# Altium PCB MB1367.PcbDoc (part 5 of 6)
Units mm, origin at the board's own origin, x right, y up, seen from the top; angles counter-clockwise.
Board outline 70 x 82.5 mm, 4 copper layers (Top Layer, Signal Layer 1, Signal Layer 2, Bottom Layer), stack 1.614 mm thick; 192 components, 143 nets, 810 pads, 920 vias.
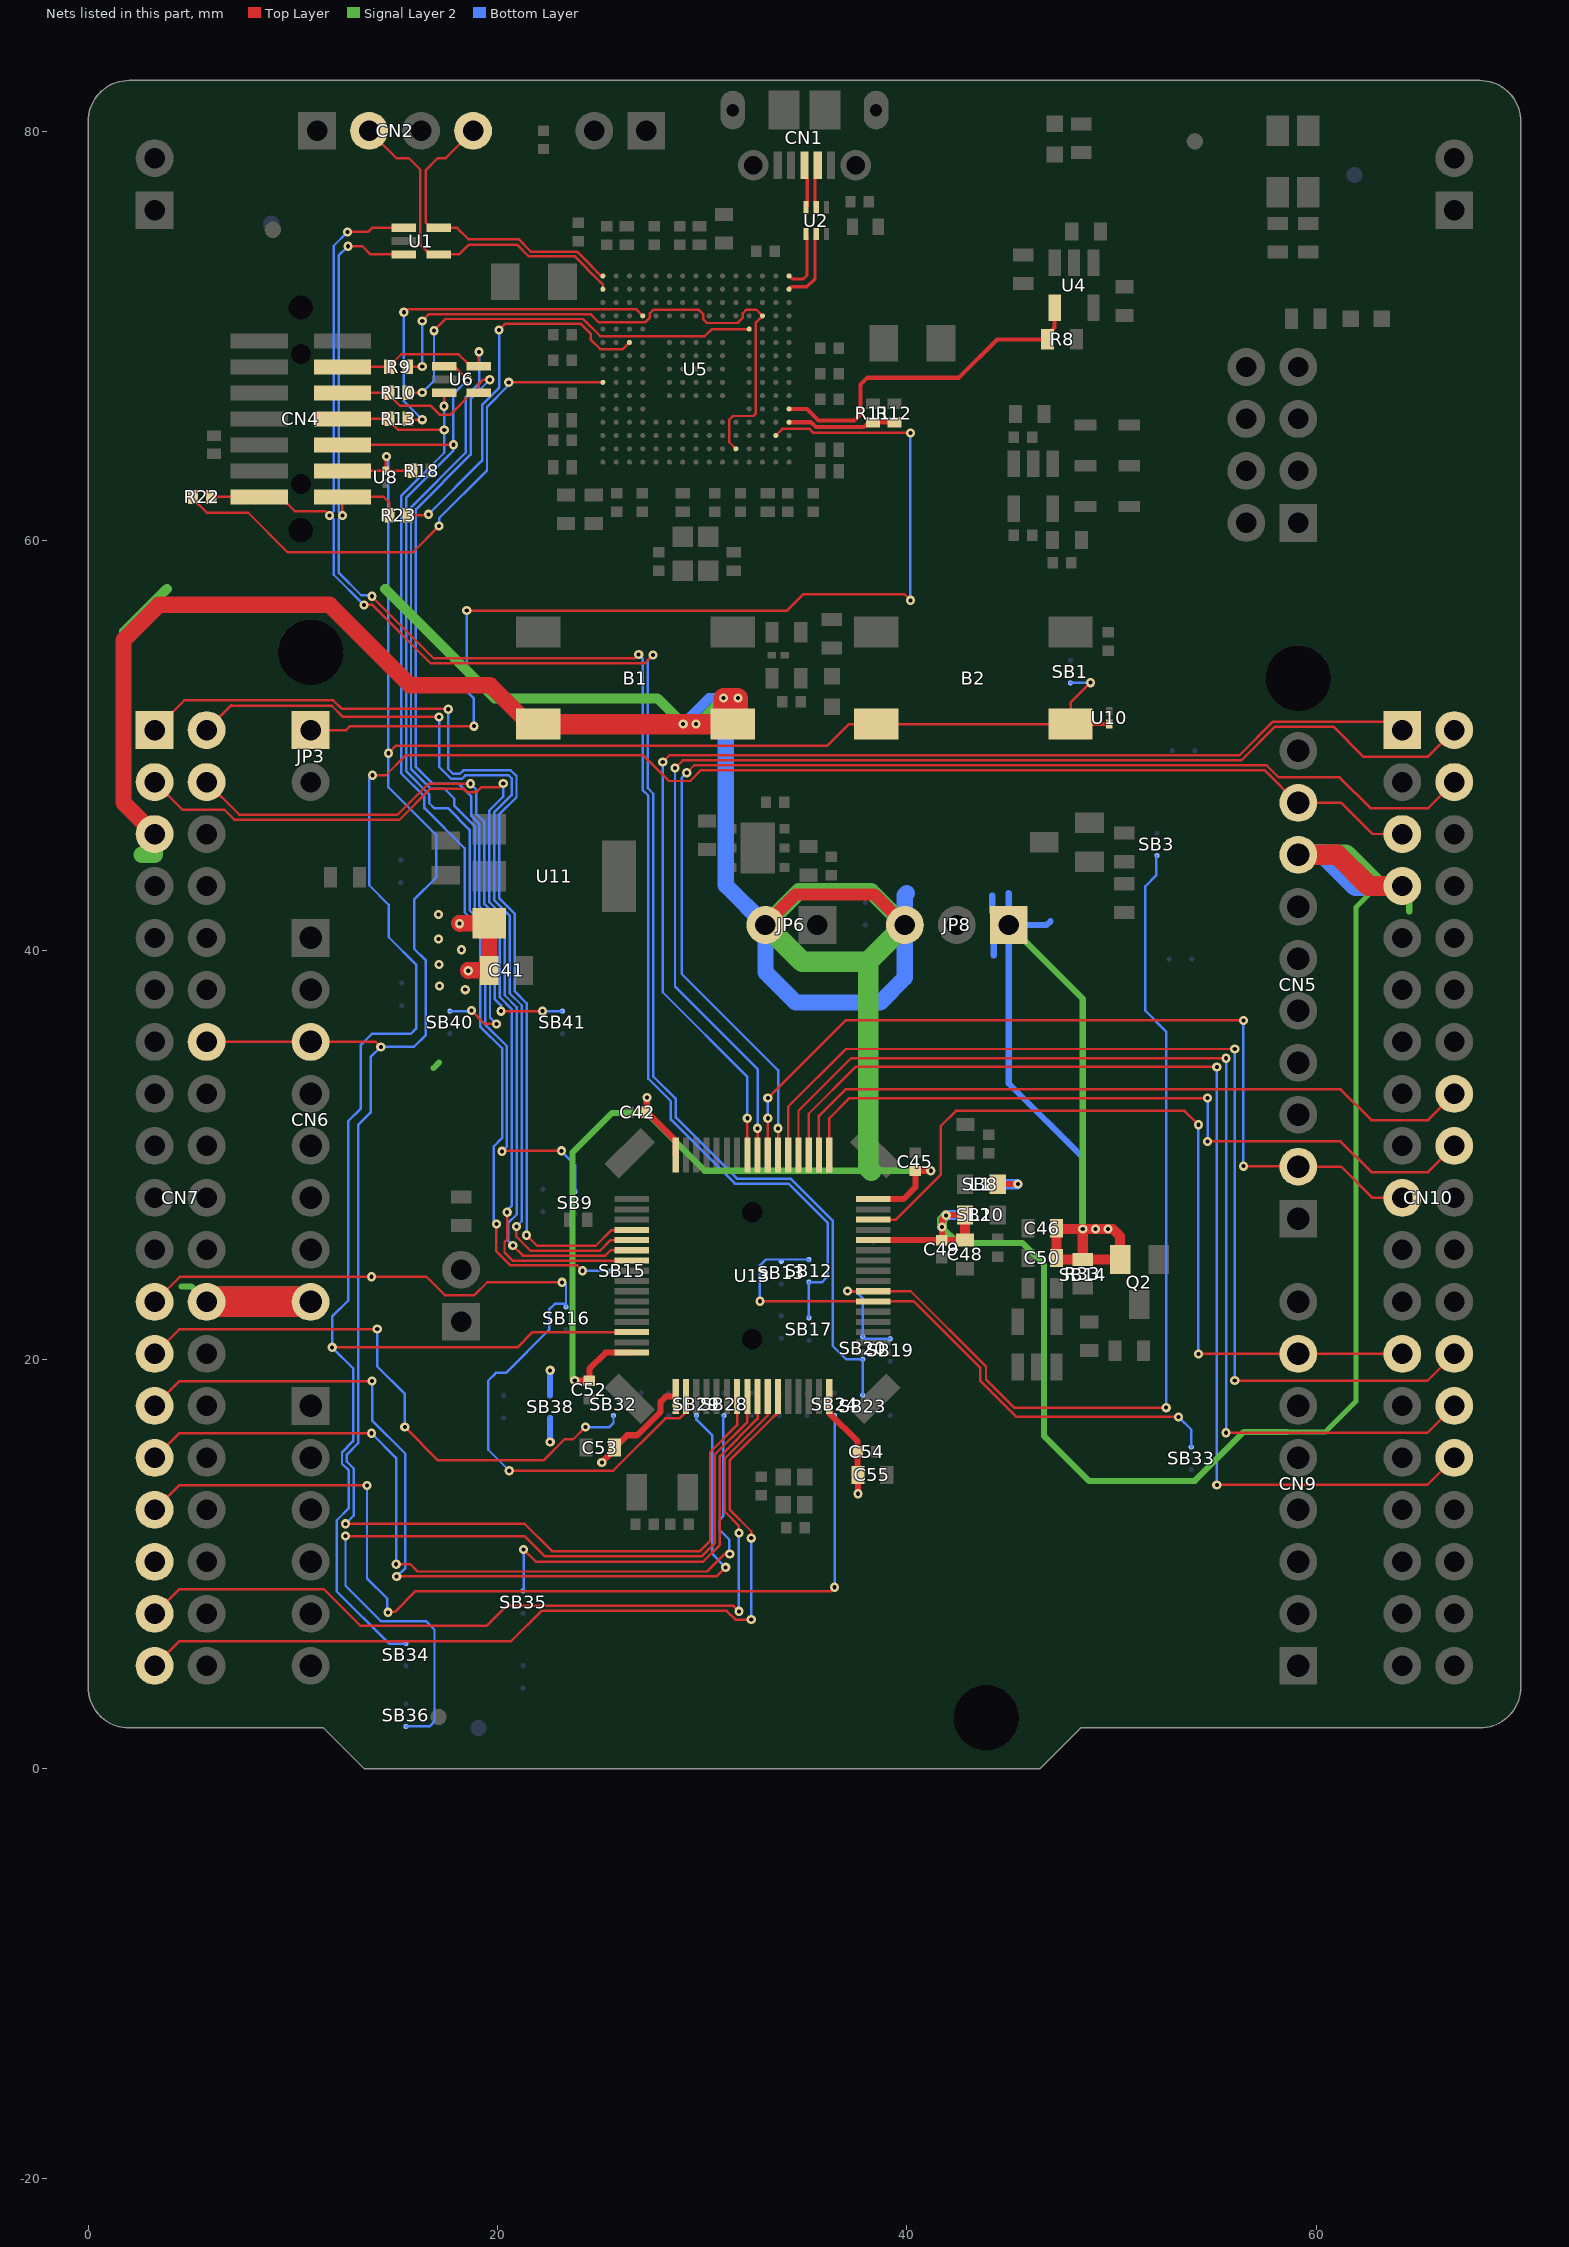
[diagram p6: the nets of this part, all layers, seen from the top]

## Via types
v1: diameter 0.45, hole 0.2, Top Layer to Bottom Layer, tented both sides, 920 vias

## Nets (pads, with @x,y where several pads share a name; then routed paths per layer and width w, separated by ;. In a path a pad name is that pad's centre, name@x,y a point inside that pad or via, vN(x,y) a via of type N, cw(c..) or ccw(c..) an arc to the next point about the centre after c; other vN are vias at no path point) (continued)
PB9: CN5.9 CN10.5 SB34.2 U13.62 | length 116.9
  Top Layer w0.12: v1(11.925,20.6) 20.975,20.6 21.715,21.34 U13.62@26.56,21.34 ; v1(13.895,48.55) 14.539,48.55 15.509,49.52 27.13,49.52 28.38,48.27 29.418,48.27 29.948,48.8 57.486,48.8 59.082,47.204 CN5.9@59.13,47.204 61.241,47.204 62.765,45.68 CN10.5@64.21,45.68
  Bottom Layer w0.12: v1(13.895,48.55) 13.736,48.391 13.736,43.175 14.69,42.221 14.69,40.637 16.025,39.302 16.025,36.17 15.775,35.92 13.866,35.92 13.325,35.379 13.325,32.268 12.71,31.653 12.71,22.885 11.925,22.1 v1(11.925,20.6) 12.95,19.575 12.95,16.014 12.405,15.469 12.405,14.908 12.74,14.573 12.74,12.74 12.15,12.15 12.15,8.675 14.7,6.125 SB34.2@15.525,6.125
PB10: CN9.7 CN10.25 U13.30 | length 40.9
  Top Layer w0.12: U13.30@38.36,26.84 39.465,26.84 41.65,29.025 41.65,31.4 42.4,32.15 53.575,32.15 v1(54.25,31.475) ; v1(54.25,20.275) 55.55,20.275 55.555,20.28 CN9.7@59.13,20.28 CN10.25@64.21,20.28
  Bottom Layer w0.12: v1(54.25,20.275) v1(54.25,31.475)
PB11: CN10.18 U13.33 | length 36
  Top Layer w0.12: U13.33@36.21,29.99 36.21,31.785 37.2,32.775 v1(54.7,32.775) ; v1(54.7,30.66) 61.2,30.66 62.7,29.16 65.47,29.16 CN10.18@66.75,30.44
  Bottom Layer w0.12: v1(54.7,30.66) v1(54.7,32.775)
PB12: CN10.16 U13.34 | length 34.6
  Top Layer w0.12: U13.34@35.71,29.99 35.71,31.91 37,33.2 61.2,33.2 62.7,31.7 65.47,31.7 CN10.16@66.75,32.98
PB13: CN10.30 U13.35 | length 55.5
  Top Layer w0.12: U13.35@35.21,29.99 35.21,32.01 37.5,34.3 v1(55.15,34.3) ; v1(55.15,13.875) 55.595,13.875 55.6,13.88 65.43,13.88 CN10.30@66.75,15.2
  Bottom Layer w0.12: v1(55.15,13.875) v1(55.15,34.3)
PB14: CN10.28 U13.36 | length 54.1
  Top Layer w0.12: U13.36@34.71,29.99 34.71,32.16 37.275,34.725 v1(55.6,34.725) ; v1(55.6,16.425) 55.605,16.42 65.43,16.42 CN10.28@66.75,17.74
  Bottom Layer w0.12: v1(55.6,16.425) v1(55.6,34.725)
PB15: CN10.26 U13.37 | length 52.8
  Top Layer w0.12: U13.37@34.21,29.99 34.21,32.36 37.025,35.175 v1(56.025,35.175) ; v1(56.025,18.975) 56.04,18.96 65.43,18.96 CN10.26@66.75,20.28
  Bottom Layer w0.12: v1(56.025,18.975) v1(56.025,35.175)
PC0: SB36.1 U13.8 | length 40.2
  Top Layer w0.12: v1(12.575,11.375) 21.325,11.375 22.315,10.385 29.967,10.385 30.625,11.043 30.625,15.372 32.21,16.957 U13.8@32.21,18.19
  Bottom Layer w0.12: v1(12.575,11.375) 12.575,8.95 14.3,7.225 16.5,7.225 16.925,6.8 16.925,2.325 16.675,2.075 SB36.1@15.525,2.075
PC1: SB35.1 U13.9 | length 20.2
  Top Layer w0.12: v1(21.275,10.725) 21.875,10.125 30.046,10.125 30.865,10.944 30.865,15.273 32.71,17.118 U13.9@32.71,18.19
  Bottom Layer w0.12: SB35.1@21.25,8.7 21.275,8.725 v1(21.275,10.725)
PC2: CN7.35 U13.10 | length 41.9
  Top Layer w0.12: CN7.35@3.25,7.58 4.455,8.785 11.515,8.785 13.295,7.005 19.48,7.005 20.44,7.965 31.535,7.965 v1(31.8,7.7) ; v1(31.8,11.525) 31.8,11.874 31.105,12.569 31.105,15.173 33.21,17.278 U13.10@33.21,18.19
  Bottom Layer w0.12: v1(31.8,7.7) v1(31.8,11.525)
PC3: CN7.37 U13.11 | length 42.8
  Top Layer w0.12: CN7.37@3.25,5.04 4.455,6.245 20.672,6.245 22.152,7.725 31.2,7.725 31.63,7.295 32.38,7.295 32.4,7.275 v1(32.4,7.3) ; v1(32.4,11.275) 32.4,11.613 31.345,12.668 31.345,15.074 33.431,17.16 33.435,17.16 33.54,17.265 33.54,17.269 33.586,17.315 33.615,17.315 33.71,17.41 U13.11@33.71,18.19
  Bottom Layer w0.12: v1(32.4,7.3) v1(32.4,11.275)
PC4: SB12.2 SB13.1 SB33.2 U13.22 | length 29.3
  Top Layer w0.12: v1(32.825,22.85) 32.835,22.84 40.353,22.84 43.595,19.598 43.595,18.962 45.357,17.2 v1(53.275,17.2)
  Bottom Layer w0.12: v1@32.825,22.825 v1(32.825,22.85) 32.825,24.6 33.115,24.89 SB12.2@35.22,24.89 SB12.2@35.22,24.805 ; v1(53.275,17.2) 53.9,16.575 SB33.2@53.9,15.725
PC5: SB3.2 SB19.1 SB20.2 U13.23 | length 50.1
  Top Layer w0.12: v1@37.075,23.35 37.085,23.34 40.193,23.34 43.87,19.663 43.87,19.026 45.246,17.65 v1(52.675,17.65)
  Bottom Layer w0.12: v1(37.1,23.35) 37.5,23.35 37.845,23.005 SB20.2@37.845,21.115 37.945,21.015 SB19.1@39.195,21.015 ; SB3.2@52.225,44.625 52.2,44.6 52.2,43.675 51.65,43.125 51.65,37.05 52.675,36.025 v1(52.675,17.65)
PC6: CN10.4 U13.38 | length 59.8
  Top Layer w0.12: v1(29.25,48.675) 29.615,49.04 57.585,49.04 58.175,48.45 61.15,48.45 62.65,46.95 65.48,46.95 CN10.4@66.75,48.22 ; U13.38@33.71,29.99 v1(33.71,31.3)
  Bottom Layer w0.12: v1(29.25,48.675) 29,48.425 29,38.85 33.71,34.14 v1(33.71,31.3)
PC7: CN5.2 CN10.19 U13.39 | length 43.1
  Top Layer w0.12: U13.39@33.21,29.99 v1(33.21,31.79) ; v1(33.21,32.775) 37.01,36.575 v1(56.45,36.575) ; v1(56.45,29.45) 59.104,29.45 CN5.2@59.13,29.424 61.241,29.424 62.765,27.9 CN10.19@64.21,27.9
  Bottom Layer w0.12: v1(33.21,31.79) v1(33.21,32.775) ; v1(56.45,29.45) v1(56.45,36.575)
PC8: CN10.2 U13.40 | length 60.7
  Top Layer w0.12: v1(28.673,48.9) 29.053,49.28 56.344,49.28 57.993,50.929 60.846,50.929 62.325,49.45 65.44,49.45 CN10.2@66.75,50.76 ; U13.40@32.71,29.99 v1(32.71,31.3)
  Bottom Layer w0.12: v1(28.673,48.9) 28.675,48.902 28.675,38.225 32.71,34.19 v1(32.71,31.3)
PC9: CN10.1 U13.41 | length 58
  Top Layer w0.12: v1(28.075,49.2) 28.395,49.52 56.245,49.52 57.9,51.175 63.795,51.175 CN10.1@64.21,50.76 ; U13.41@32.21,29.99 v1(32.21,31.79)
  Bottom Layer w0.12: v1(28.075,49.2) 28.075,37.95 32.21,33.815 v1(32.21,31.79)
PC10: CN7.1 U13.52 | length 50.7
  Top Layer w0.12: CN7.1@3.25,50.76 4.705,52.215 11.972,52.215 12.382,51.805 17.566,51.805 v1(17.596,51.775) ; v1(21.425,26.075) 21.94,25.56 24.8,25.56 25.55,26.31 26.56,26.31 U13.52@26.56,26.34
  Bottom Layer w0.12: v1(17.596,51.775) 17.596,48.86 17.833,48.622 18.169,48.622 18.334,48.787 20.649,48.787 20.93,48.507 20.93,47.478 20.08,46.628 20.08,42.551 20.835,41.796 20.835,38.001 21.425,37.411 v1(21.425,26.075)
PC11: CN7.2 U13.53 | length 48
  Top Layer w0.12: CN7.2@5.79,50.76 7.005,51.975 7.035,51.945 11.903,51.945 12.448,51.4 v1(17.15,51.4) ; v1(20.925,26.5) 20.925,26.002 21.607,25.32 25.005,25.32 25.525,25.84 U13.53@26.56,25.84
  Bottom Layer w0.12: v1(17.15,51.4) 17.15,48.966 17.734,48.382 18.268,48.382 18.433,48.547 20.55,48.547 20.69,48.407 20.69,47.578 19.84,46.728 19.84,42.451 20.595,41.696 20.595,37.901 21.185,37.311 21.185,26.76 v1(20.925,26.5)
PC12: CN7.3 U13.54 | length 48.5
  Top Layer w0.12: CN7.3@3.25,48.22 4.605,46.865 6.66,46.865 7.145,46.38 15.208,46.38 16.723,47.895 18.344,47.895 18.509,47.73 18.98,47.73 19.205,47.955 20.098,47.955 v1(20.285,48.142) ; v1(20.75,25.575) 21.245,25.08 25.265,25.08 25.525,25.34 U13.54@26.56,25.34
  Bottom Layer w0.12: v1(20.285,48.142) 20.275,48.15 20.275,47.502 19.6,46.827 19.6,42.352 20.355,41.597 20.355,37.802 20.945,37.212 20.945,27.093 20.52,26.668 20.52,25.805 v1(20.75,25.575)
PC13: CN7.23 SB16.2 U13.2 | length 43.7
  Top Layer w0.12: CN7.23@3.25,22.82 4.48,24.05 v1(13.85,24.05) 16.525,24.05 17.425,23.15 18.875,23.15 19.501,23.776 v1(23.151,23.776) ; v1(20.575,14.57) 25.65,14.57 28.205,17.125 28.9,17.125 29.21,17.435 U13.2@29.21,18.19
  Bottom Layer w0.12: v1(20.575,14.57) 19.55,15.595 19.55,18.975 19.925,19.35 20.417,19.35 22.525,21.458 22.525,22.45 22.8,22.725 23.35,22.725 ; v1(23.151,23.776) 23.249,23.776 23.35,23.675 23.35,22.725 ; SB16.2@23.35,22.575 23.35,22.725
PC14: CN7.25 SB32.1 | length 28.7
  Top Layer w0.12: CN7.25@3.25,20.28 4.455,21.485 14.11,21.485 v1(14.125,21.5) ; v1(15.475,16.7) 17.1,15.075 22.248,15.075 23.278,16.105 23.705,16.105 v1(24.3,16.7)
  Bottom Layer w0.12: v1(14.125,21.5) 14.125,19.664 15.475,18.314 v1(15.475,16.7) ; v1(24.3,16.7) 25.475,16.7 25.67,16.895 SB32.1@25.67,17.265
PC15: CN7.27 SB29.1 | length 45.8
  Top Layer w0.12: CN7.27@3.25,17.74 4.455,18.945 13.87,18.945 v1(13.875,18.95) ; v1(15.075,9.4) 15.08,9.405 30.705,9.405 v1(31.15,9.85)
  Bottom Layer w0.12: v1(13.875,18.95) 13.875,17.025 15.5,15.4 15.5,9.825 v1(15.075,9.4) ; SB29.1@29.72,17.265 29.72,17.065 30.5,16.285 30.5,10.5 v1(31.15,9.85)
PD2: CN7.4 U13.55 | length 44.4
  Top Layer w0.12: CN7.4@5.79,48.22 7.39,46.62 15.108,46.62 16.624,48.135 v1(18.677,48.135) ; v1(20.476,27.201) 20.476,25.874 20.345,25.743 20.345,25.234 20.739,24.84 U13.55@26.56,24.84
  Bottom Layer w0.12: v1(18.677,48.135) 18.965,47.847 18.965,46.666 19.36,46.271 19.36,42.252 20.115,41.497 20.115,37.702 20.705,37.112 20.705,27.53 20.476,27.301 v1(20.476,27.201)
PF0: CN7.29 SB28.1 | length 41.9
  Top Layer w0.12: CN7.29@3.25,15.2 4.455,16.405 13.845,16.405 v1(13.85,16.4) ; v1(15.05,10) 15.742,10 16.097,9.645 30.245,9.645 31.101,10.501 v1(31.352,10.501)
  Bottom Layer w0.12: v1(13.85,16.4) 15.05,15.2 v1(15.05,10) ; SB28.1@31.07,17.265 31.035,17.23 31.035,12.35 30.865,12.18 30.865,11.662 31.325,11.202 31.325,10.527 v1(31.352,10.501)
PF1: CN7.31 SB24.1 | length 48.3
  Top Layer w0.12: CN7.31@3.25,12.66 4.455,13.865 4.47,13.85 v1(13.625,13.85) ; v1(14.651,7.65) 14.675,7.675 14.989,7.675 15.999,8.685 36.285,8.685 v1(36.475,8.875)
  Bottom Layer w0.12: v1(13.625,13.85) 13.625,9.313 14.625,8.312 14.625,7.65 v1(14.651,7.65) ; SB24.1@36.47,17.265 36.425,17.22 36.475,17.17 v1(36.475,8.875)
STLK_SWCLK: CN2.2 U1.4 U5.A14 | length 17.3
  Top Layer w0.12: CN2.2@13.73,80.04 15.07,78.7 15.675,78.7 16.225,78.15 16.225,74.475 16.7,74 U1.4@17.125,74 18.125,74 18.605,74.48 20.95,74.48 21.53,73.9 23.795,73.9 24.375,73.32 24.375,73.294 25.024,72.645 25.03,72.645 25.15,72.525 U5.A14@25.15,72.3
STLK_SWDIO: CN2.4 U1.5 U5.A15 | length 15.4
  Top Layer w0.12: CN2.4@18.81,80.04 17.47,78.7 17.075,78.7 16.5,78.125 16.5,75.55 16.75,75.3 U1.5@17.125,75.3 18.025,75.3 18.575,74.75 21.019,74.75 21.629,74.14 23.894,74.14 24.615,73.419 24.615,73.399 25.064,72.95 U5.A15@25.15,72.95
STLK_VCP_RX: R23.1 U5.C10 | length 18.8
  Top Layer w0.12: R23.1@15.625,61.25 16.575,61.25 v1(16.627,61.302) ; v1(20.08,70.305) 20.075,70.305 20.375,70.605 24.081,70.605 24.555,70.13 24.555,69.845 25.025,69.375 26.125,69.375 U5.C10@26.45,69.7
  Bottom Layer w0.12: v1(16.627,61.302) 19.25,63.925 19.25,66.65 20.08,67.48 v1(20.08,70.305)
STLK_VCP_TX: R22.1 U5.A7 | length 26.8
  Top Layer w0.12: R22.1@5.125,62.15 5.125,62.05 5.8,61.375 7.825,61.375 9.75,59.45 15.875,59.45 v1(17.15,60.725) ; v1(20.55,67.75) U5.A7@25.15,67.75
  Bottom Layer w0.12: v1(17.15,60.725) 17.15,61.111 19.49,63.451 19.49,66.551 20.55,67.611 v1(20.55,67.75)
T_JTDI: CN4.10 SB9.1 U6.1 | length 53.5
  Top Layer w0.12: CN4.10@12.427,64.695 17.845,64.695 v1(17.85,64.7) ; U6.1@17.395,68.54 17.885,68.54 v1(18.55,67.875) ; v1(20.225,30.175) 20.25,30.2 v1(23.125,30.2)
  Bottom Layer w0.12: v1(18.55,67.875) 17.85,67.175 v1(17.85,64.7) 17.85,64.42 15.535,62.105 15.535,48.751 16.67,47.616 16.67,47.182 16.907,46.945 17.578,46.945 18.64,45.883 18.64,41.954 19.395,41.199 19.395,36.38 20.465,35.31 20.465,30.415 v1(20.225,30.175) ; v1(23.125,30.2) 23.1,30.2 23.795,29.505 SB9.1@23.795,28.215
T_NRST: B2.1 B2.2 CN4.12 CN6.3 CN7.14 R18.2 SB1.2 U8.1 U10.1 U13.7 | length 134.8
  Top Layer w0.12: CN7.14@5.79,35.52 CN6.3@10.87,35.52 14.055,35.52 v1(14.3,35.275) ; CN4.12@12.427,63.425 14.543,63.425 U8.1@14.545,63.427 ; v1(12.575,11.975) 21.336,11.975 22.686,10.625 29.867,10.625 30.385,11.143 30.385,15.471 31.71,16.796 U13.7@31.71,18.19 ; v1(14.575,64.125) 14.545,64.095 U8.1@14.545,63.427 ; v1(14.675,49.625) 15.05,50 36.125,50 37.175,51.05 B2.2@38.505,51.05 B2.1@48.005,51.05 ; R18.2@15.85,63.425 14.547,63.425 U8.1@14.545,63.427 ; B2.1@48.008,51.052 B2.1@48.005,51.05 ; v1(48.975,53.075) 48.005,52.105 B2.1@48.005,51.05
  Top Layer w0.2: B2.1@48.008,51.052 U10.1@49.895,51.052
  Bottom Layer w0.12: v1(12.575,11.975) 12.98,12.38 12.98,14.672 12.645,15.007 12.645,15.37 13.19,15.915 13.19,31.454 13.805,32.069 13.805,34.78 v1(14.3,35.275) 15.913,35.275 16.505,35.867 16.505,39.501 15.93,40.076 15.93,42.475 17.01,43.555 17.01,45.631 14.675,47.966 v1(14.675,49.625) 14.675,64.025 v1(14.575,64.125) ; SB1.2@47.995,53.065 48.965,53.065 v1(48.975,53.075)
T_NRSTa: JP3.1 U5.P3 | length 51
  Top Layer w0.12: JP3.1@10.87,50.76 12.61,50.76 12.8,50.95 v1(18.85,50.95) ; v1(18.5,56.6) 34.15,56.6 34.95,57.4 39.875,57.4 v1(40.175,57.1) ; U5.P3@33.6,65.15 33.925,65.475 35.251,65.475 35.446,65.28 40.145,65.28 40.15,65.275 v1(40.175,65.275)
  Bottom Layer w0.12: v1(18.5,56.6) 18.5,52.65 18.85,52.3 v1(18.85,50.95) ; v1(40.175,57.1) v1(40.175,65.275)
T_PWR_EN: R8.1 U4.4 U5.R5 | length 17.1
  Top Layer w0.2: U5.R5@34.25,66.45 35.125,66.45 35.695,65.88 37.455,65.88 37.745,66.17 37.745,67.645 38.075,67.975 42.55,67.975 44.42,69.845 R8.1@46.885,69.845 46.885,70.085 47.225,70.425 U4.4@47.225,71.395
T_PWR_EXT: R11.2 R12.2 U5.R4 | length 5.3
  Top Layer w0.2: U5.R4@34.25,65.8 35.322,65.8 35.562,65.56 37.91,65.56 38.15,65.8 R11.2@38.35,65.8 R12.2@39.4,65.8
T_SWCLK: CN4.6 R10.2 SB41.1 U6.4 | length 46.5
  Top Layer w0.12: CN4.6@12.427,67.235 14.715,67.235 R10.2@14.72,67.24 14.72,67.13 15.25,66.6 16.75,66.6 17.175,66.175 17.7,66.175 18.765,67.24 U6.4@19.095,67.24 19.095,67.67 19.3,67.875 v1(19.625,67.875) ; v1(20.175,37.025) v1(22.2,37.025)
  Bottom Layer w0.12: v1(19.625,67.875) 18.69,66.94 18.69,64.215 16.015,61.54 16.015,48.95 16.823,48.142 18.097,48.142 18.725,47.514 18.725,46.567 19.12,46.172 19.12,42.153 19.875,41.398 19.875,37.603 20.175,37.303 v1(20.175,37.025) ; v1(22.2,37.025) SB41.1@23.175,37.025
T_SWCLKa: R10.1 U5.M11 | length 20.1
  Top Layer w0.12: R10.1@15.62,67.24 16.315,67.24 v1(16.325,67.25) ; v1(16.9,70.275) 17.47,70.845 24.18,70.845 25.02,70.005 30.13,70.005 30.475,70.35 U5.M11@32.3,70.35
  Bottom Layer w0.12: v1(16.325,67.25) 16.9,67.825 v1(16.9,70.275)
T_SWDIO: CN4.4 R9.2 SB40.1 U6.5 | length 47
  Top Layer w0.12: CN4.4@12.427,68.505 R9.2@14.71,68.505 ; R9.2@14.75,68.525 14.75,68.575 15.3,69.125 18.1,69.125 18.685,68.54 U6.5@19.095,68.54 19.095,69.345 19.1,69.34 v1(19.1,69.24) ; v1(18.725,37.05) 19.375,36.4 v1(19.95,36.4)
  Bottom Layer w0.12: SB40.1@17.675,37.025 18.7,37.025 v1(18.725,37.05) ; v1(19.1,69.24) 19.1,67.689 18.45,67.039 18.45,64.314 15.775,61.639 15.775,48.851 16.723,47.902 17.4,47.902 17.9,47.403 17.895,47.398 17.895,47.057 18.88,46.072 18.88,42.054 19.635,41.299 19.635,36.715 v1(19.95,36.4)
T_SWDIOa: R9.1 U5.L2 U5.N12 | length 29.1
  Top Layer w0.12: R9.1@15.62,68.515 16.315,68.515 v1(16.325,68.525) ; v1(16.325,70.75) 16.66,71.085 24.54,71.085 24.95,70.675 27.206,70.675 27.445,70.914 27.445,71.126 27.624,71.305 29.826,71.305 30.045,71.086 30.045,70.844 30.239,70.65 31.731,70.65 31.995,70.914 31.995,71.126 32.174,71.305 32.645,71.305 U5.N12@32.95,71 32.625,70.675 32.625,66.225 32.505,66.105 31.505,66.105 31.325,65.925 31.325,64.825 U5.L2@31.65,64.5
  Bottom Layer w0.12: v1(16.325,68.525) v1(16.325,70.75)
T_SWO: CN4.8 R13.2 SB15.2 U6.3 | length 56.7
  Top Layer w0.12: CN4.8@12.427,65.965 R13.2@14.72,65.965 14.72,65.855 15.14,65.435 17.39,65.435 v1(17.4,65.425) ; U6.3@17.015,67.24 U6.3@17.395,67.24 v1(17.395,66.58) ; v1(19.95,26.625) 19.95,25.289 20.639,24.6 23.9,24.6 v1(24.16,24.34)
  Bottom Layer w0.12: v1@17.395,66.575 v1(17.395,66.58) ; v1@17.4,66.575 v1(17.4,65.425) 17.4,64.309 15.295,62.204 15.295,48.652 16.43,47.517 16.43,46.947 18.4,44.977 18.4,41.855 19.155,41.1 19.155,36.281 20.225,35.211 20.225,30.825 19.82,30.42 19.82,26.755 v1(19.95,26.625) ; v1(24.16,24.34) SB15.2@25.545,24.34
T_SWOa: R13.1 U5.D12 | length 18.3
  Top Layer w0.12: v1(15.425,71.175) 15.575,71.325 26.775,71.325 U5.D12@27.1,71 ; R13.1@15.62,65.965 15.66,65.925 v1(16.325,65.925) v1@16.425,65.925
  Bottom Layer w0.12: v1(15.425,71.175) 15.42,71.17 15.42,66.83 v1(16.325,65.925)
T_VCP_RX: CN4.13 R22.2 SB20.1 SB23.1 U1.1 | length 86.4
  Top Layer w0.12: R22.2@6.025,62.15 8.358,62.15 8.37,62.138 8.375,62.143 9.407,62.143 10.1,61.45 11.6,61.45 v1(11.8,61.25) ; v1(12.675,75.1) 13.675,75.1 13.875,75.3 U1.1@15.425,75.3 ; v1(13.475,56.875) 13.886,56.875 16.736,54.025 27.2,54.025 v1(27.6,54.425)
  Bottom Layer w0.12: v1(12.675,75.1) 12,74.425 12,61.45 v1(11.8,61.25) 12,61.05 12,58.35 v1(13.475,56.875) ; v1(27.6,54.425) 27.35,54.175 27.35,47.914 27.615,47.649 27.615,33.824 28.715,32.724 28.715,31.824 31.699,28.84 34.324,28.84 36.375,26.789 36.375,20.675 37.035,20.015 SB20.1@37.845,20.015 SB23.1@37.845,18.265
T_VCP_TX: CN4.14 R23.2 SB12.1 SB17.1 U1.3 | length 78.3
  Top Layer w0.12: v1(12.425,61.25) v1(12.425,61.25) CN4.14@12.427,62.155 14.445,62.155 14.725,61.875 R23.2@14.725,61.25 ; v1(12.7,74.4) 13.4,74.4 13.8,74 U1.3@15.425,74 ; v1(13.875,57.3) 13.95,57.375 13.95,57.2 16.885,54.265 26.715,54.265 v1(26.9,54.45)
  Bottom Layer w0.12: v1(12.7,74.4) 12.24,73.94 12.24,61.435 v1(12.425,61.25) 12.24,61.065 12.24,58.449 13.345,57.345 13.83,57.345 v1(13.875,57.3) ; v1(26.9,54.45) 27.11,54.24 27.11,47.815 27.375,47.55 27.375,33.725 28.475,32.625 28.475,31.725 31.6,28.6 34.225,28.6 36.135,26.69 36.135,24.055 35.87,23.79 SB12.1@35.22,23.79 SB17.1@35.22,22.04
USB_DEV_HS_CN_N: CN1.2 U2.5 | length 2.1
  Top Layer w0.16: U2.5@35.575,76.3 35.518,76.357 35.518,77.693 35.65,77.825 CN1.2@35.65,78.35
USB_DEV_HS_CN_P: CN1.3 U2.6 | length 2.1
  Top Layer w0.16: CN1.3@35,78.35 35,77.825 35.132,77.693 35.132,76.357 U2.6@35.075,76.3
USB_DEV_HS_N: U2.2 U5.R14 | length 3.7
  Top Layer w0.16: U5.R14@34.25,72.3 34.364,72.414 35.114,72.414 35.518,72.818 35.518,74.943 U2.2@35.575,75
USB_DEV_HS_P: U2.1 U5.R15 | length 3.1
  Top Layer w0.16: U5.R15@34.25,72.95 34.4,72.8 34.954,72.8 35.125,72.971 35.125,74.95 U2.1@35.075,75
VBAT: C53.2 CN7.33 SB38.2 U13.1 | length 6.5
  Top Layer w0.3: v1(25.1,14.975) 25.725,15.6 C53.2@25.725,15.7 26.33,16.305 26.825,16.305 27.967,17.448 27.967,17.942 28.215,18.19 U13.1@28.71,18.19
  Bottom Layer w0.3: v1(22.575,15.975) SB38.2@22.575,17.15
VDD: B1.1 B1.2 C42.2 C45.2 C52.2 C54.2 C55.2 CN7.5 JP6.2 JP8.3 L1.1 SB8.1 SB38.1 U13.16 U13.32 U13.48 U13.64 | length 201.2
  Top Layer w0.3: v1(23.775,18.975) 23.785,18.965 C52.2@24.495,18.965 24.495,19.545 25.29,20.34 U13.64@26.56,20.34 ; v1(27.3,32.8) 27.295,32.795 C42.2@27.295,32.09 27.31,32.09 28.71,30.69 U13.48@28.71,29.99 ; U13.16@36.21,18.19 36.21,17.39 37.595,16.005 C54.2@37.595,15.49 37.595,14.39 C55.2@37.62,14.365 v1(37.62,13.445) ; U13.32@38.36,27.84 39.84,27.84 40.42,28.42 C45.2@40.42,29.215 41.185,29.215 v1(41.175,29.225) ; L1.1@44.445,28.565 44.455,28.575 v1(45.425,28.575)
  Top Layer w0.6: JP6.2@33.095,41.235 33.095,41.252 34.568,42.725 38.415,42.725 JP8.3@39.905,41.235
  Top Layer w0.8: CN7.5@3.25,45.68 1.725,47.205 1.725,55.15 3.45,56.875 11.8,56.875 15.725,52.95 19.65,52.95 B1.2@21.55,51.05
  Top Layer w1: B1.2@21.55,51.05 B1.2@21.995,51.05 v1(29.7,51.05) B1.1@31.495,51.05 ; B1.1@31.495,51.05 31.05,51.495 v1(31.05,52.325) v1(31.75,52.325) 31.75,51.305 B1.1@31.495,51.05
  Signal Layer 2 w0.3: v1(23.775,18.975) 23.665,19.085 23.665,30.115 25.6,32.05 27.3,32.05 ; v1(27.3,32.8) 27.3,32.05 ; v1(41.175,29.225) 38.275,29.225 30.125,29.225 27.3,32.05
  Signal Layer 2 w0.5: CN7.5@3.25,45.68 1.77,47.16 1.77,55.57 3.85,57.65 ; 14.515,57.65 19.865,52.3 27.825,52.3 v1(29.075,51.05) 29.775,51.05 v1(31.05,52.325) v1(31.75,52.325)
  Signal Layer 2 w0.8: 2.618,44.665 3.25,44.665 CN7.5@3.25,45.68 ; JP6.2@33.095,41.235 34.735,42.875 38.265,42.875 JP8.3@39.905,41.235
  Signal Layer 2 w1: JP6.2@33.095,41.235 34.88,39.45 38.12,39.45 ; 38.275,29.225 38.12,29.38 38.12,39.45 ; JP8.3@39.905,41.235 38.12,39.45
  Bottom Layer w0.3: SB38.1@22.575,18.25 v1(22.575,19.475) ; v1(37.62,13.445) v1@37.625,13.45 ; v1@45.415,28.565 v1(45.425,28.575)
  Bottom Layer w0.5: v1(29.075,51.05) v1@29.125,51.1 ; v1@29.1,51.1 v1@29.125,51.1 ; SB8.1@44.145,28.565 v1@45.415,28.565 ; v1@29.125,51.1 30.35,52.325 v1(31.05,52.325) v1(31.75,52.325) 31.75,51.775 31.15,51.175 31.075,51.1 v1@29.125,51.1
  Bottom Layer w0.8: v1(31.05,52.325) 31.15,52.225 31.15,51.175 31.15,43.18 JP6.2@33.095,41.235 33.095,38.93 34.575,37.45 38.7,37.45 39.905,38.655 JP8.3@39.905,41.235 39.905,42.69 40,42.785
VIN: C41.2 CN6.8 CN7.24 U11.3 | length 16.9
  Top Layer w0.8: v1(18.15,41.3) 18.135,41.315 U11.3@19.595,41.315 C41.2@19.595,39.015 18.56,39.015 v1(18.575,39)
  Top Layer w1.5: CN7.24@5.79,22.82 CN6.8@10.87,22.82
  Signal Layer 2 w0.3: 4.575,23.575 5.035,23.575 CN7.24@5.79,22.82 ; 16.88,34.248 17.15,34.518
  Signal Layer 2 w1.5: CN7.24@5.79,22.82 CN6.8@10.87,22.82
  other v1: 18.425,38.075 17.175,38.25 17.15,39.3 18.25,40.025 17.125,40.55 17.125,41.75
VREF: C46.2 C50.2 JP8.1 Q2.2 R33.2 SB14.1 | length 54.7
  Top Layer w0.5: R33.2@48.595,24.89 48.595,26.37 v1(48.6,26.375) ; R33.2@48.595,24.89 Q2.2@50.42,24.89 50.42,26.03 50.075,26.375 v1(49.825,26.375) v1(49.225,26.375) v1(48.6,26.375) ; R33.2@48.595,24.89 47.395,24.89 C50.2@47.32,24.965 C46.2@47.32,26.415 47.36,26.375 v1(48.6,26.375)
  Signal Layer 2 w0.3: JP8.1@44.985,41.235 48.6,37.62 v1(48.6,26.375) v1(49.225,26.375) v1(49.825,26.375)
  Bottom Layer w0.3: 44.175,42.675 44.175,41.875 44.815,41.235 JP8.1@44.985,41.235 ; 44.25,39.75 44.25,40.5 JP8.1@44.985,41.235 ; 44.975,42.785 44.985,42.775 JP8.1@44.985,41.235 ; 47.025,41.425 46.835,41.235 JP8.1@44.985,41.235 ; SB14.1@48.595,24.69 48.6,24.695 v1(48.6,26.375) ; v1(49.825,26.375) v1(49.225,26.375) v1(48.6,26.375) ; JP8.1@44.985,41.235 44.985,33.49 48.6,29.875 v1(48.6,26.375)
VREFP: C48.1 C49.1 CN5.8 CN10.7 L2.2 SB10.2 U13.28 | length 86.2
  Top Layer w0.3: U13.28@38.36,25.84 C49.1@41.72,25.84 ; C48.1@42.845,25.84 C49.1@41.72,25.84 ; L2.2@42.845,27.065 41.94,27.065 v1(41.925,27.05) 41.72,26.845 v1(41.72,26.475) C49.1@41.72,25.84
  Top Layer w0.5: C48.1@42.845,25.84 L2.2@42.845,27.065
  Top Layer w1: CN5.8@59.13,44.664 61.036,44.664 62.56,43.14 CN10.7@64.21,43.14
  Signal Layer 2 w0.25: 58.597,16.47 60.455,16.47 61.95,17.965 61.95,42.105 62.985,43.14
  Signal Layer 2 w0.3: v1(41.72,26.475) 42.495,25.7 45.65,25.7 46.7,24.65 46.7,16.275 48.9,14.075 54.075,14.075 56.47,16.47 58.597,16.47 ; CN10.7@64.21,43.14 64.55,42.8 64.55,41.9
  Signal Layer 2 w0.5: v1(41.72,26.475) 41.72,26.845 v1(41.925,27.05)
  Signal Layer 2 w1: CN5.8@59.13,44.664 61.461,44.664 62.985,43.14 CN10.7@64.21,43.14
  Bottom Layer w0.3: v1(41.925,27.05) v1@41.94,27.065
  Bottom Layer w0.5: v1(41.72,26.475) 41.72,26.845 v1(41.925,27.05) ; v1@41.94,27.065 42.845,27.065
  Bottom Layer w1: CN5.8@59.13,44.664 60.411,44.664 61.935,43.14 CN10.7@64.21,43.14
pads on no net: CART-1.1 CN1.4 CN4.0 CN4.1 CN4.2 CN4.9 CN7.9 CN7.10 CN7.11 CN7.26 CN10.10 CN10.36 CN10.38 MP1.1 MP2.1 MP3.1 MP4.1 MP5.1 MP6.1 U2.4 U5.A1 U5.A2 U5.A3 U5.A4 U5.A5 U5.A6 U5.A8 U5.A9 U5.A10 U5.A11 U5.A12 U5.A13 U5.B1 U5.B2 U5.B3 U5.B4 U5.B5 U5.B6 U5.B7 U5.B8 U5.B9 U5.B10 U5.B11 U5.B12 U5.B13 U5.B14 U5.B15 U5.C2 U5.C3 U5.C4 U5.C11 U5.C12 U5.C13 U5.C14 U5.C15 U5.D1 U5.D2 U5.D3 U5.D4 U5.D10 U5.D11 U5.D13 U5.D14 U5.E1 U5.E2 U5.E3 U5.E4 U5.E12 U5.E13 U5.E14 U5.E15 U5.F1 U5.F4 U5.F14 U5.G4 U5.G14 U5.G15 U5.H1 U5.H2 U5.H3 U5.H4 U5.H14 U5.H15 U5.J2 U5.J3 U5.J4 U5.K1 U5.K2 U5.K3 U5.K12 U5.K14 U5.K15 U5.L1 U5.L3 U5.L12 U5.L13 U5.L14 U5.L15 U5.M2 U5.M3 U5.M4 U5.M5 U5.M6 U5.M7 U5.M12 U5.M13 U5.M14 U5.M15 U5.N2 U5.N4 U5.N5 U5.N6 U5.N7 U5.N11 U5.N13 U5.N14 U5.N15 U5.P2 U5.P4 U5.P5 U5.P6 U5.P7 U5.P8 U5.P9 U5.P10 U5.P11 U5.P12 U5.P13 U5.P14 U5.P15 U5.R2 U5.R3 U5.R6 U5.R7 U5.R8 U5.R9 U5.R10 U5.R11 U5.R12 U5.R13 U12.3 U12.5 U13.0 U14.1 U14.2

## Polygon pours and split planes (outlines as drawn)
GND on Top Layer "GND_L01_P002" (solid, remove dead copper, pour order 2): 31.675,77.625 33.25,76.05 33.25,71.275 34.15,70.375 38.15,70.375 40,72.225 40,82.5 30.65,82.5 30.65,78.675 31.675,77.65
5V_USB_STLK on Top Layer "5V_USB_STLK_L01_P078" (solid, remove dead copper, pour order 78): 49.5,77.075 49.1,76.675 49.1,74.95 48.825,74.675 48.825,72.9 48.85,72.925 51.775,72.925 52.45,72.25 61.65,72.25 61.85,72.45 61.85,73.325 61.575,73.6 54.575,73.6 51.1,77.075
AGND on Top Layer "AGND_L01_P066" (solid, remove dead copper, pour order 66): 46.5,23.025 46.25,23.275 46.25,24.875 46.25,26.875 46.025,27.1 45.275,27.1 45.125,26.95 45.125,25.575 44.9,25.35 44.095,25.35 43.97,25.225 41.05,25.225 40.925,25.35 40.82,25.35 40.75,25.28 40.75,23.375 43.625,20.5 46,20.5 46.5,21
5V_VIN on Top Layer "5V_VIN_L01_P036" (solid, remove dead copper, pour order 36): 49.775,62.525 49.525,62.275 49.525,59.575 50.05,59.05 60.525,59.05 60.875,59.4 60.875,64.175 60.575,64.475 58.475,64.475 56.525,62.525
E5V on Top Layer "E5V_L01_P034" (solid, remove dead copper, pour order 34): 49.775,64.525 49.5,64.25 49.5,63.05 49.75,62.8 56.375,62.8 58.325,64.75 60.55,64.75 60.875,65.075 60.875,66.775 60.725,66.925 58.7,66.925 56.825,65.05 54.425,65.05 53.9,64.525
5V_USB_CHGR on Top Layer "5V_USB_CHGR_L01_P032" (solid, remove dead copper, pour order 32): 54.392,65.417 56.592,65.417 58.3,67.125 60.65,67.125 60.9,67.375 60.9,69.25 60.725,69.425 58.775,69.425 56.725,67.375 54.575,67.375 54.225,67.025 49.875,67.025 49.5,66.65 49.5,65 49.7,64.8 53.775,64.8
GND on Top Layer "GND_L01_P010" (solid, remove dead copper, pour order 10): 20.975,39.9 20.8,39.725 20.8,38.025 21.075,37.75 26.95,37.75 27.275,38.075 27.275,39.5 26.875,39.9
VIN on Top Layer "VIN_L01_P008" (solid, remove dead copper, pour order 8): 20.5,42.125 20.625,42 20.625,38.025 20.35,37.75 17.1,37.75 16.75,38.1 16.75,41.85 17.025,42.125
5V_VIN on Top Layer "5V_VIN_L01_P004" (solid, remove dead copper, pour order 4): 15.775,42.375 15.525,42.125 14.075,42.125 14,42.2 14,43.735 14.765,44.5 16.3,44.5 20.4,44.5 21,45.1 21,46.925 21.425,47.35 26.8,47.35 27.3,46.85 27.3,40.7 26.725,40.125 21.7,40.125 21.225,40.6 21.225,41.825 20.675,42.375
GND on Top Layer "GND_L01_P006" (solid, remove dead copper, pour order 6): 20.625,45.025 20.35,44.75 16.15,44.75 15.875,45.025 15.875,48.2 16.275,48.6 20.275,48.6 20.625,48.25
5V on Top Layer "5V_L01_P028" (solid, remove dead copper, pour order 28): 59.775,69.638 58.463,69.638 56.575,67.75 54.25,67.75 53.875,67.375 45.3,67.375 44.175,66.25 39.175,66.25 39.025,66.4 39.025,67.625 39.175,67.775 42.8,67.775 44.025,69 50.175,69 53.075,71.9 59.525,71.9 59.775,71.65
AGND on Top Layer "AGND_L01_P064" (solid, remove dead copper, pour order 64): 44.35,11.75 44,11.4 44,8.8 44.425,8.375 68.475,8.375 68.925,8.825 68.925,13.925 68.625,14.225 65.65,14.225 63.175,11.75
GND on Top Layer "GND_L01_P082" (solid, remove dead copper, pour order 82): 33.425,75.125 22.475,75.125 21.875,74.525 21.875,71.775 23,70.65 23,61.95 23.2,61.75 36,61.75 36.375,62.125 36.375,71.9 36.675,72.2 37.85,72.2 38.7,71.35 38.7,66.525 39.35,65.875 44.5,65.875 45.475,66.85 48.725,66.85 49.125,66.45 49.125,59.4 49.9,58.625 60.85,58.625 61.225,59 61.225,64.425 61.375,64.575 61.375,71.425 62.25,72.3 62.25,73.5 61.775,73.975 54.75,73.975 51.225,77.5 49.775,77.5 49.775,82.3 49.75,82.325 49.825,82.4 68.625,82.4 69.85,81.175 69.85,14.5 63.8,14.5 61.5,12.2 48.2,12.2 47,13.4 47,26.775 46.45,27.325 29.075,27.325 27.85,28.55 27.85,47.025 27.05,47.825 19.125,47.825 16.15,44.85 16.15,44.75 14.35,44.75 13.575,43.975 13.575,2.375 13.55,2.35 1.5,2.35 0.2,3.65 0.2,81.1 1.3,82.2 32.325,82.2 33.4,81.125
GND on Top Layer "GND_L01_P084" (solid, remove dead copper, pour order 84): 13.3,39.675 13.35,39.675 14.025,39 16.075,39 16.4,38.675 16.4,37.8 16.875,37.325 20.625,37.325 20.825,37.525 20.824,37.526 20.824,38.001 24.976,38.001 26.875,39.9 28.4,39.9 28.4,28.825 29.425,27.8 39.5,27.8 39.5,23.525 44.175,18.85 49.625,18.85 49.625,13.625 48.2,12.2 44.1,12.2 43.55,11.65 43.55,8.625 44.2,7.975 69.65,7.975 69.7,7.925 69.7,3.4 68.525,2.225 48.3,2.225 46.275,0.2 13.675,0.2 9.95,3.925 9.95,39.65
GND on Top Layer "GND_L01_P086" (solid, remove dead copper, pour order 86): 39.725,82.2 39.725,73.05 38.95,72.275 37.1,72.275 37.1,69.35 38.174,68.276 42.476,68.276 43.675,69.475 49.95,69.475 50.65,70.175 50.65,71.925 50,72.575 48.725,72.575 48.5,72.8 48.5,76.5 49.5,77.5 49.9,77.5 49.9,82.2
VIN on Bottom Layer "VIN_L04_P012" (solid, remove dead copper, pour order 12): 16.975,42.25 16.625,41.9 16.625,37.875 16.875,37.625 19.5,37.625 19.875,38 19.875,41.925 19.55,42.25
5V_VIN on Bottom Layer "5V_VIN_L04_P014" (solid, remove dead copper, pour order 14): 21.5,47.5 20.375,46.375 20.375,40.47 20.72,40.125 26.575,40.125 26.92,40.47 26.92,47.23 26.65,47.5
5V_USB_STLK on Bottom Layer "5V_USB_STLK_L04_P080" (solid, remove dead copper, pour order 80): 58.5,61.4 58.5,59.025 59,58.525 63.225,58.525 63.95,59.25 63.95,73.65 60.2,77.4 49.35,77.4 48.9,76.95 48.9,75.35 49.3,74.95 56.6,74.95 61.125,70.425 61.125,62.05 60.475,61.4
VREF on Bottom Layer "VREF_L04_P074" (solid, remove dead copper, pour order 74): 44.375,43.45 44,43.075 44,33.5 47.875,29.625 47.875,25.21 48.21,24.875 50.2,24.875 50.75,25.425 50.75,42.5 49.8,43.45
AGND on Bottom Layer "AGND_L04_P070" (solid, remove dead copper, pour order 70): 36.875,25.95 36.625,25.7 36.625,24.575 37,24.2 40.825,24.2 41.125,23.9 41.125,22.068 42.25,20.943 42.25,9.625 42.875,9 46.15,9 46.55,9.4 46.55,25.425 47.625,26.5 47.625,29.525 45.125,32.025 43.925,32.025 43.7,31.8 43.7,30.9 44.225,30.375 45.05,30.375 46.3,29.125 46.3,27.35 44.9,25.95
VDD on Bottom Layer "VDD_L04_P056" (solid, remove dead copper, pour order 56): 29.225,53 28.45,52.225 28.45,50.3 29.723,49.027 29.723,48.123 29.4,47.8 29.4,39.425 33.1,35.725 39.8,35.725 41.45,37.375 41.45,43 41,43.45 39.275,43.45 38.975,43.15 38.975,38.775 38.525,38.325 34.85,38.325 34.1,39.075 34.1,52.45 33.55,53
3V3 on Bottom Layer "3V3_L04_P048" (solid, remove dead copper, pour order 48): 34.5,39.325 35.025,38.8 38.3,38.8 38.625,39.125 38.625,63.45 38.3,63.775 36.875,63.775 36.5,63.4 36.5,58.4 34.5,56.4
E5V on Bottom Layer "E5V_L04_P042" (solid, remove dead copper, pour order 42): 49.775,64.525 49.5,64.25 49.5,63.05 49.75,62.8 56.375,62.8 58.325,64.75 60.55,64.75 60.875,65.075 60.875,66.775 60.725,66.925 58.7,66.925 56.825,65.05 54.425,65.05 53.9,64.525
5V_USB_CHGR on Bottom Layer "5V_USB_CHGR_L04_P040" (solid, remove dead copper, pour order 40): 54.392,65.417 56.592,65.417 58.3,67.125 60.65,67.125 60.9,67.375 60.9,69.9 60.475,70.325 50.35,70.325 49.5,69.475 49.5,65 49.7,64.8 53.775,64.8
5V_VIN on Bottom Layer "5V_VIN_L04_P038" (solid, remove dead copper, pour order 38): 57.675,59.175 57.725,59.175 58.175,59.625 58.175,61.75 58.325,61.9 60.5,61.9 60.875,62.275 60.875,64.175 60.575,64.475 58.475,64.475 56.525,62.525 49.775,62.525 49.525,62.275 49.525,59.75 50.1,59.175
3V3 on Bottom Layer "3V3_L04_P050" (solid, remove dead copper, pour order 50): 11.3,32 11.3,32.025 11.875,32.6 11.875,58 9.675,60.2 9.675,68.65 9.025,69.3 5.275,69.3 4.875,68.9 4.875,66.2 6,65.075 6,62.25 1.225,57.475 1.225,32.625 1.85,32
GND on Bottom Layer "GND_L04_P104" (solid, remove dead copper, pour order 104): 1.15,57.85 5.65,62.35 5.65,65.025 4.525,66.15 4.525,69.275 4.95,69.7 9.375,69.7 10.2,68.875 10.2,60.65 12.4,58.45 12.4,32.6 11.125,31.325 0.825,31.325 0.275,30.775 0.275,3.525 1.525,2.275 11.375,2.275 13.425,0.225 46.475,0.225 48.525,2.275 68.525,2.275 69.8,3.55 69.8,81.05 68.625,82.225 12.054,82.225 11.55,81.721 11.55,75.65 13.8,73.4 13.8,62.25 19.45,56.6 33.85,56.6 35.8,58.55 35.8,63.65 36.4,64.25 38.65,64.25 39.35,63.55 39.35,44.675 39.925,44.1 47.9,44.1 48.925,45.125 48.925,69.85 49.875,70.8 57.475,70.8 57.75,71.075 57.725,71.1 57.725,72.55 55.95,74.325 49.075,74.325 48.5,74.9 48.5,77.5 48.875,77.875 60.425,77.875 64.5,73.8 64.5,58.6 63.751,57.851 52.876,57.851 51.775,56.75 51.775,24.85 50.975,24.05 50.875,24.15 48.525,24.15 47.675,23.3 47.675,9.175 46.55,8.05 42.45,8.05 41.325,9.175 41.325,20.325 40.425,21.225 40.425,22.975 39.775,23.625 36.85,23.625 36.05,24.425 36.05,26.025 36.075,26.025 37,26.95 40.825,26.95 41.575,27.7 41.575,34.45 40.725,35.3 32.775,35.3 28.2,39.875 20.85,39.875 20.25,39.275 20.25,37.75 19.725,37.225 16.425,37.225 15.85,37.8 15.85,41.95 16.675,42.775 19.225,42.775 19.95,43.5 19.95,46.35 21.5,47.9 27.125,47.9 27.925,48.7 27.925,57.375 27.45,57.85 18.775,57.85 13.8,62.825 13.8,74.25 12.225,75.825 12.225,82.125 12,82.35 1.5,82.35 0.325,81.175 0.325,57.975 0.45,57.85
GND on Bottom Layer "GND_L04_P106" (solid, remove dead copper, pour order 106): 18.325,58.725 18.325,55.4 21.725,52 27.5,52 28.925,53.425 33.425,53.425 33.9,53.9 33.9,57.975 33.15,58.725
GND on Bottom Layer "GND_L04_P108" (solid, remove dead copper, pour order 108): 10.725,82.3 10.725,63.3 14.4,59.625 21.8,59.625 24.925,62.75 24.925,81.925 24.55,82.3
GND on Bottom Layer "GND_L04_P110" (solid, remove dead copper, pour order 110): 52.835,57.81 52.82,57.825 50.075,57.825 48.475,59.425 46.65,59.425 46.65,45.35 47.9,44.1 50.175,44.1 51.425,42.85 54.025,42.85 54.025,56.701 52.876,57.851
GND on Signal Layer 2 "GND_L03_P022" (solid, remove dead copper, pour order 22): 30.925,82.475 30.925,77.425 33.25,75.1 33.25,73.35 33.6,73 34.1,73 35.475,71.625 35.725,71.625 36.9,72.8 36.9,77.425 37.801,78.326 37.801,82.474 37.8,82.475
3V3_STLK on Signal Layer 2 "3V3_STLK_L03_P020" (solid, remove dead copper, pour order 20): 10.4,81.4 9.725,81.4 8.625,80.3 8.625,75.15 26.35,57.425 35.375,57.425 36.35,58.4 36.35,65.925 36.65,66.225 36.65,69.475 38.4,71.225 38.4,73.925 43.45,78.975 57.35,78.975 57.7,79.325 57.7,80.75 57.2,81.25 39.95,81.25 37.125,78.425 37.125,72.65 36.025,71.55 35.2,71.55 34.025,72.725 33.425,72.725 33.025,73.125 33.025,74.925 30.675,77.275 30.675,80.75 30.05,81.375
VDD on Signal Layer 2 "VDD_L03_P060" (solid, remove dead copper, pour order 60): 21.173,19.298 21.175,18.4 22,17.575 25.77,17.575 26.775,16.57 26.775,8 28,6.775 28.725,6.775 33.35,6.775 38.15,11.575 38.15,24.865 41.285,28 45.225,28 45.7,28.475 45.7,34.95 42.375,38.275 42.375,42.925 41.9,43.425 33.675,43.425 31.35,41.1 31.35,39.25 22.025,29.925 22.025,20.15
GND on Signal Layer 2 "GND_L03_P098" (solid, remove dead copper, pour order 98): 22.825,39.85 22.075,39.1 22.075,32.075 22.325,31.825 23.5,31.825 30.45,38.775 30.45,39.5 30.1,39.85
GND on Signal Layer 2 "GND_L03_P100" (solid, remove dead copper, pour order 100): 52.5,48.65 52.175,48.65 49.725,46.2 49.725,43.675 50.55,42.85 50.55,38.077 50.802,37.825 52.025,37.825 52.65,38.45 52.65,48.5
VREF on Signal Layer 2 "VREF_L03_P072" (solid, remove dead copper, pour order 72): 43.475,43.375 42.975,42.875 42.975,38.425 46.15,35.25 46.15,28 48.075,26.075 49.95,26.075 50.125,26.25 50.125,42.575 49.325,43.375
GND on Signal Layer 2 "GND_L03_P092" (solid, remove dead copper, pour order 92): 33.175,54.675 32.825,54.325 32.85,54.3 32.85,51.525 33,51.375 33.725,51.375 35.875,53.525 35.875,54.475 35.675,54.675
AGND on Signal Layer 2 "AGND_L03_P068" (solid, remove dead copper, pour order 68): 44,25.25 41.825,23.075 41.825,10.025 43.1,8.75 44.975,8.75 45.775,9.55 45.775,24.75 45.275,25.25
E5V on Signal Layer 2 "E5V_L03_P044" (solid, remove dead copper, pour order 44): 49.6,64.6 49.375,64.375 49.375,62.875 49.5,62.75 52.1,62.75 52.25,62.9 52.25,64.375 52.025,64.6
5V_VIN on Signal Layer 2 "5V_VIN_L03_P016" (solid, remove dead copper, pour order 16): 29.275,40.125 33.425,44.275 47.225,44.275 52.35,49.4 52.35,62.35 52.15,62.55 49.55,62.55 49.375,62.375 49.375,59.525 37.225,47.375 21.4,47.375 18.65,44.625 16.125,44.625 13.975,42.475 13.975,39.45 14.175,39.25 15.475,39.25 15.775,39.55 15.775,41.85 16.3,42.375 18.325,42.375 20.575,40.125
GND on Signal Layer 2 "GND_L03_P026" (solid, remove dead copper, pour order 26): 56.825,82.35 58.15,81.025 58.15,79.375 58.6,78.925 62,78.925 69.425,71.5 69.9,71.5 69.9,81.45 69,82.35
VDD on Signal Layer 2 "VDD_L03_P058" (solid, remove dead copper, pour order 58): 31.9,50.575 32.475,51.15 32.475,53.95 32.05,54.375 23.3,54.375 17.95,59.725 1.625,59.725 1.225,59.325 1.225,44.025 3.925,44.025 4.25,44.35 4.25,46.775 8.05,50.575
E5V on Signal Layer 2 "E5V_L03_P062" (solid, remove dead copper, pour order 62): 4.625,46.65 4.625,44 6.225,42.4 13.025,42.4 15.925,45.3 18.375,45.3 20.925,47.85 36.925,47.85 48.775,59.7 48.775,62.3 49.225,62.75 52.1,62.75 52.25,62.9 52.25,64.375 52.026,64.599 49.599,64.599 49.598,64.6 47.475,64.6 33.125,50.25 8.225,50.25
VBAT on Signal Layer 2 "VBAT_L03_P112" (solid, remove dead copper, pour order 112): 19.725,18.1 18.975,17.35 1.05,17.35 0.9,17.2 0.9,3.6 1.625,2.875 11.75,2.875 12.05,3.175 17.925,3.175 21.625,6.875 25.775,6.875 26.275,7.375 26.275,16.275 25.4,17.15 21.675,17.15 20.725,18.1
VIN on Signal Layer 2 "VIN_L03_P018" (solid, remove dead copper, pour order 18): 16.1,29.875 15.25,29.025 15.25,27.55 11.45,23.75 2.625,23.75 2.225,23.35 2.225,18.275 2.625,17.875 18.65,17.875 21.15,20.375 21.15,30.275 21.875,31 21.875,38.375 18.125,42.125 16.385,42.125 16.1,41.84
GND on Signal Layer 2 "GND_L03_P096" (solid, remove dead copper, pour order 96): 0.8,24.35 0.7,24.45 0.75,24.5 0.75,41.75 1.125,42.125 13.075,42.125 13.7,41.5 13.7,39.4 14.15,38.95 15.5,38.95 15.775,38.675 15.775,30.25 14.8,29.275 14.8,27.975 11.175,24.35
5V_USB_CHGR on Signal Layer 2 "5V_USB_CHGR_L03_P024" (solid, remove dead copper, pour order 24): 43.4,78.525 38.75,73.875 38.75,71.675 39.05,71.375 43.025,71.375 49.6,64.8 51.575,64.8 52.375,65.6 52.375,70.275 52.75,70.65 57.575,70.65 58,70.225 58,67.65 58.275,67.375 63.525,67.375 64.675,66.225 64.675,42.7 65.825,41.55 68.275,41.55 68.875,42.15 68.875,71.45 61.8,78.525
5V on Signal Layer 2 "5V_L03_P030" (solid, remove dead copper, pour order 30): 58.15,55.775 58.15,68.025 57.62,68.575 57.625,69.25 57.625,69.95 57.325,70.25 53.1,70.25 52.9,70.05 52.925,70.025 52.925,38.125 50.5,35.7 50.5,18.5 53.275,18.5 53.725,18.95 53.725,33.375 56.975,36.625 56.975,54.6
GND on Signal Layer 2 "GND_L03_P090" (solid, remove dead copper, pour order 90): 37.025,64.45 37.325,64.15 38.525,64.15 39.05,63.625 39.05,58.825 39.425,58.45 39.45,58.475 40.475,58.475 46.95,64.95 46.95,67.175 43.025,71.1 38.6,71.1 37.025,69.525
GND on Signal Layer 2 "GND_L03_P094" (solid, remove dead copper, pour order 94): 63.125,66.725 64.075,65.775 64.075,49 62.9,47.825 58.55,47.825 57.85,48.525 57.85,54.1 59.075,55.325 59.075,66.125 59.675,66.725
VREFP on Signal Layer 2 "VREFP_L03_P076" (solid, remove dead copper, pour order 76): 41.225,27.475 40.95,27.2 40.95,25.8 41.25,25.5 45.52,25.5 46,25.02 46,14.425 47.25,13.175 65.925,13.175 66.9,14.15 66.9,39.725 64.21,42.415 64.21,43.965 60.971,47.204 57.704,47.204 57.375,46.875 57.375,36.1 54.125,32.85 54.125,18.7 53.5,18.075 50.45,18.075 50.05,18.475 50.05,23.575 46.875,26.75 44.825,26.75 44.1,27.475
GND on Signal Layer 2 "GND_L03_P102" (solid, remove dead copper, pour order 102): 12.15,2.55 12.15,1.7 13.6,0.25 46.5,0.25 48.425,2.175 68.525,2.175 69.825,3.475 69.825,40.95 69.6,41.175 68.375,41.175 68.025,40.825 68.025,13.65 66.975,12.6 47.05,12.6 46.4,11.95 46.4,9.375 45.3,8.275 42.725,8.275 41.35,9.65 41.35,23.775 41,24.125 39.05,24.125 38.675,23.75 38.675,11.375 33.675,6.375 22.25,6.375 18.425,2.55
3V3 on Signal Layer 2 "3V3_L03_P052" (solid, remove dead copper, pour order 52): 5.325,69.8 4.625,69.1 4.625,66.65 5.2,66.075 12.475,66.075 23.6,54.95 37.125,54.95 38.625,56.45 38.625,63.5 38.3,63.825 36.925,63.825 36.575,63.475 36.575,58.2 35.375,57 26.2,57 13.4,69.8
GND on Signal Layer 2 "GND_L03_P088" (solid, remove dead copper, pour order 88): 9.525,82.225 8.075,80.775 8.075,74.55 10.395,72.23 10.395,70.845 9.95,70.4 5.15,70.4 4.125,69.375 4.125,66.375 4.975,65.525 11.825,65.525 14.775,62.575 14.775,60.55 14.45,60.225 0.325,60.225 0.275,60.275 0.275,81.2 1.3,82.225
GND on Signal Layer 1 "GND_L02_P000" (solid, remove dead copper, pour order 0): 0.325,82.5 0,82.175 0,2.4 0.4,2 11.5,2 13.5,0 46.5,0 48.5,2 69.875,2 70,2.125 70,81.975 69.475,82.5

## Other copper
Top Layer:
  pour cut-out: 31.054,60.916 35.959,60.916 37.184,62.141 37.184,69.674 37.108,69.75 35.95,69.75 35.95,63.025 35.05,62.125 31.025,62.125
  pour cut-out: 22.216,70.344 22.216,61.884 23.184,60.916 27.609,60.916 27.65,60.957 27.65,62.45 24.5,62.45 23.525,63.425 23.55,63.45 23.55,73.5 24.75,74.7 31.825,74.7 32.116,74.991 32.116,75.884 30.376,75.884 30.36,75.9 25.275,75.9 24.35,74.975 21.446,74.975 20.725,74.254 20.725,71.25 21.625,70.35 21.725,70.35
  pour cut-out: 8.8,70.275 8.875,70.35 11.85,70.35 12.55,69.65 13.913,69.65 14.022,69.541 14.022,69.065 14.265,69.065 14.275,69.075 16.5,69.075 17.85,67.725 17.85,64.7 17.784,64.7 17.518,64.434 17.502,64.45 14.5,64.45 14.126,64.076 14.126,62.336 13.465,61.675 6.975,61.675 6.75,61.9 6.75,70.05 7,70.3
  text "1" at 34.37,2.04 h2.5
Signal Layer 1:
  text "2" at 36.12,2.04 h2.5
Signal Layer 2:
  text "3" at 39.12,2.04 h2.5
Bottom Layer:
  pour cut-out: 33.37,20.34 36.341,20.34 36.3,20.381 36.3,24.91 35.72,25.49 33.37,25.49
  pour cut-out: 25.069,19.031 25.069,16.519 25.05,16.5 25.052,16.498 39.795,16.498 39.695,16.598 39.695,18.965
  text "4" at 41.12,2.04 h2.5
Multi-Layer:
  pour cut-out: 33.62,4.29 33.62,1.29 42.12,1.29 42.12,4.29

## Silkscreen, mask and mechanical layers (free items; w line width, h text height)
Top Overlay:
  drawing of 813 lines, arcs and shapes, not listed
  text "USB" at 40.075,79.125 h1.7
  text "STLK" at 40.125,77.7 h1.7
  text "OC" at 46.15,76.95 h1.7
  text "STLK" at 18.25,76.9 h1.5
  text "COM" at 61.875,76.775 h1.7 r90
  text "RESERVED" at 7.35,75.9 h1.5
  text "_RST" at 18.25,75.575 h1.5
  text "GND" at 65.175,73.425 h1.7
  text "GND" at 1.625,73.375 h1.7
  text "5V_PWR" at 63.925,70.5 h1.5
  text "5V_CHRG" at 61.625,68.075 h1.7
  text "E5V" at 61.625,65.4 h1.7
  text "5V_VIN" at 61.625,62.95 h1.7
  text "5V_STLK" at 61.625,60.425 h1.7
  text "5V_SEL" at 55.125,58.15 h1.7
  text "DEBUG" at 7.425,58.05 h2
  text "SCL/D15" at 51.625,49.25 h1.7
  text "RESET" at 40.425,48.55 h2
  text "USER" at 24.575,48.525 h2
  text "RST" at 12.55,48.1 h1.7
  text "SDA/D14" at 51.525,46.625 h1.7
  text "E5V" at 7.47,45.115 h1.7
  text "VREFP" at 52.65,44.1 h1.7
  text "VREF" at 40,42.95 h2
  text "GND" at 7.314,42.632 h1.7
  text "GND" at 54.475,41.525 h1.7
  text "IDD" at 28.625,40.55 h2
  text "SCK/D13" at 51.475,39 h1.7
  text "3V3" at 12.394,37.552 h1.7
  text "MISO/D12" at 50.775,36.55 h1.7
  text "www.st.com/stm32nucleo" at 18.625,35.075 h2
  text "NRST" at 12.394,34.758 h1.7
  text "PWM/MOSI/D11" at 46.8,33.975 h1.7
  text "3V3" at 12.394,32.472 h1.7
  text "PWM/CS/D10" at 48.425,31.475 h1.7
  text "5V" at 12.394,29.678 h1.7
  text "PWM/D9" at 51.75,28.875 h1.7
  text "GND" at 12.25,27.275 h1.7
  text "D8" at 55.875,26.3 h1.7
  text "POWER" at 16.775,25.875 h1.7 r90
  text "GND" at 12.394,24.598 h1.7
  text "D7" at 55.9,22.325 h1.7
  text "VIN" at 12.394,22.058 h1.7
  text "PWM/D6" at 52.15,19.725 h1.6
  text "BOOT0" at 15.4,18.8 h2
  text "PWM/D5" at 51.775,17.2 h1.7
  text "A0" at 12.394,16.978 h1.7
  text "24MHz" at 32.775,15.05 h0.8
  text "32.768KHz" at 26.4,14.775 h0.8
  text "D4" at 55.9,14.675 h1.7
  text "A1" at 12.394,14.438 h1.7
  text "PWM/D3" at 51.8,12.075 h1.7
  text "A2" at 12.394,11.898 h1.7
  text "CPN" at 38.875,10.225 h1.5
  text "AIN" at 15.55,10.025 h1.7 r90
  text "D2" at 55.875,9.575 h1.7
  text "A3" at 12.394,9.358 h1.7
  text "TX/D1" at 53.675,7.025 h1.7
  text "A4" at 12.394,6.818 h1.7
  text "RX/D0" at 53.375,4.425 h1.7
  text "A5" at 12.394,4.278 h1.7
  text "MB1367C" at 21.675,1.525 h2.5
Bottom Overlay:
  drawing of 365 lines, arcs and shapes, not listed
  text "CN12" at 5.8,80.45 h2
  text "CN11" at 68.7,80.375 h2
  text "CN1" at 42.575,79.575 h2
  text "1" at 9.575,79.417 h2
  text "1" at 29.425,79.417 h2
  text "CN2" at 16.85,77.1 h2
  text "JP1" at 27.225,77.1 h2
  text "1" at 36.6,76.367 h2
  text "1" at 65.075,75.492 h2
  text "1" at 5.525,75.417 h2
  text "CN4" at 12.1,72.575 h2
  text "SN" at 34.75,72.5 h1.5
  text "JP5" at 59.35,70.125 h2
  text "2" at 14.25,69.192 h2
  text "1" at 7.425,69.125 h2
  text "RoHS" at 37.095,62.24 h1.6
  text "13" at 7.4,61.55 h2
  text "14" at 15.05,61.55 h2
  text "COMPLIANT" at 37.495,60.84 h0.8
  text "1" at 61.25,60.267 h2
  text "2002/95/EC" at 37.995,59.54 h0.8
  text "CN7" at 6.25,52.375 h2
  text "CN10" at 67.675,52.3 h2
  text "1" at 1.98,50.252 h2
  text "2" at 68.93,50.127 h2
  text "1" at 9.35,50.092 h2
  text "10" at 62.201,49.059 h2
  text "3" at 1.98,47.712 h2
  text "4" at 68.93,47.587 h2
  text "9" at 61.312,46.519 h2
  text "JP3" at 12.5,45.275 h2
  text "5" at 1.98,45.172 h2
  text "6" at 68.93,45.047 h2
  text "8" at 61.312,43.979 h2
  text "JP8" at 43.85,42.9 h2
  text "JP6" at 35.775,42.85 h2
  text "7" at 1.98,42.632 h2
  text "8" at 68.93,42.507 h2
  text "CN6" at 12.675,42.35 h2
  text "7" at 61.312,41.439 h2
  text "1" at 47.175,40.542 h2
  text "9" at 1.98,40.092 h2
  text "1" at 9.6,40.092 h2
  text "10" at 69.692,39.967 h2
  text "1" at 35.042,39.075 h2 r270
  text "6" at 61.312,38.899 h2
  text "11" at 1.98,37.552 h2
  text "2" at 9.6,37.552 h2
  text "12" at 69.692,37.427 h2
  text "5" at 61.312,36.359 h2
  text "13" at 1.98,35.012 h2
  text "3" at 9.6,35.012 h2
  text "14" at 69.692,34.887 h2
  text "CN5" at 56.4,34.15 h2 r270
  text "4" at 61.312,33.819 h2
  text "15" at 1.98,32.472 h2
  text "4" at 9.6,32.472 h2
  text "16" at 69.692,32.347 h2
  text "3" at 61.312,31.279 h2
  text "17" at 1.98,29.932 h2
  text "5" at 9.6,29.932 h2
  text "18" at 69.692,29.807 h2
  text "2" at 61.312,28.739 h2
  text "19" at 1.98,27.392 h2
  text "6" at 9.6,27.392 h2
  text "20" at 69.819,27.267 h2
  text "1" at 60.931,26.199 h2
  text "JP7" at 19.75,26.025 h2
  text "21" at 1.98,24.852 h2
  text "7" at 9.6,24.852 h2
  text "22" at 69.819,24.727 h2
  text "23" at 1.98,22.312 h2
  text "8" at 9.6,22.312 h2
  text "24" at 69.819,22.187 h2
  text "8" at 61.312,22.135 h2
  text "1" at 20.425,21.142 h2
  text "25" at 1.98,19.772 h2
  text "26" at 69.819,19.647 h2
  text "7" at 61.312,19.595 h2
  text "CN8" at 12.525,19.525 h2
  text "27" at 1.98,17.232 h2
  text "1" at 9.6,17.232 h2
  text "28" at 69.819,17.107 h2
  text "6" at 61.312,17.055 h2
  text "29" at 1.98,14.692 h2
  text "2" at 9.6,14.692 h2
  text "30" at 69.819,14.567 h2
  text "5" at 61.312,14.515 h2
  text "31" at 1.98,12.152 h2
  text "3" at 9.6,12.152 h2
  text "32" at 69.819,12.027 h2
  text "4" at 61.312,11.975 h2
  text "CN9" at 56.25,11.675 h2 r270
  text "33" at 1.98,9.612 h2
  text "4" at 9.6,9.612 h2
  text "34" at 69.819,9.487 h2
  text "3" at 61.312,9.435 h2
  text "35" at 1.98,7.072 h2
  text "5" at 9.6,7.072 h2
  text "36" at 69.819,6.947 h2
  text "2" at 61.312,6.895 h2
  text "37" at 1.98,4.532 h2
  text "6" at 9.6,4.532 h2
  text "38" at 69.819,4.407 h2
  text "1" at 60.931,4.355 h2
Top Solder:
  rectangle: 33.87,1.54 41.87,4.04
Bottom Solder:
  rectangle: 33.87,1.54 41.87,4.04
M1-Board Shape:
  lines w0.1: 48.5,2 46.5,0 13.5,0 11.5,2 2,2 cw(c2,4) 0,4 0,58 0,80.5 cw(c2,80.5) 2,82.5 68,82.5 cw(c68,80.5) 70,80.5 ; 48.5,2 48.5,2 ; 48.5,2 68,2 ccw(c68,4) 70,4 70,58 70,80.5 ; 70,80.5 70,80.5